# Altium PCB PCB_Air Data Controller_2021-07-25.pcbdoc
Units mil, origin at the board's own origin, x right, y up, seen from the top; angles counter-clockwise.
Board outline 4950 x 4235 mil, 2 copper layers (Top Layer, Bottom Layer); 48 components, 79 nets, 283 pads, 68 vias.
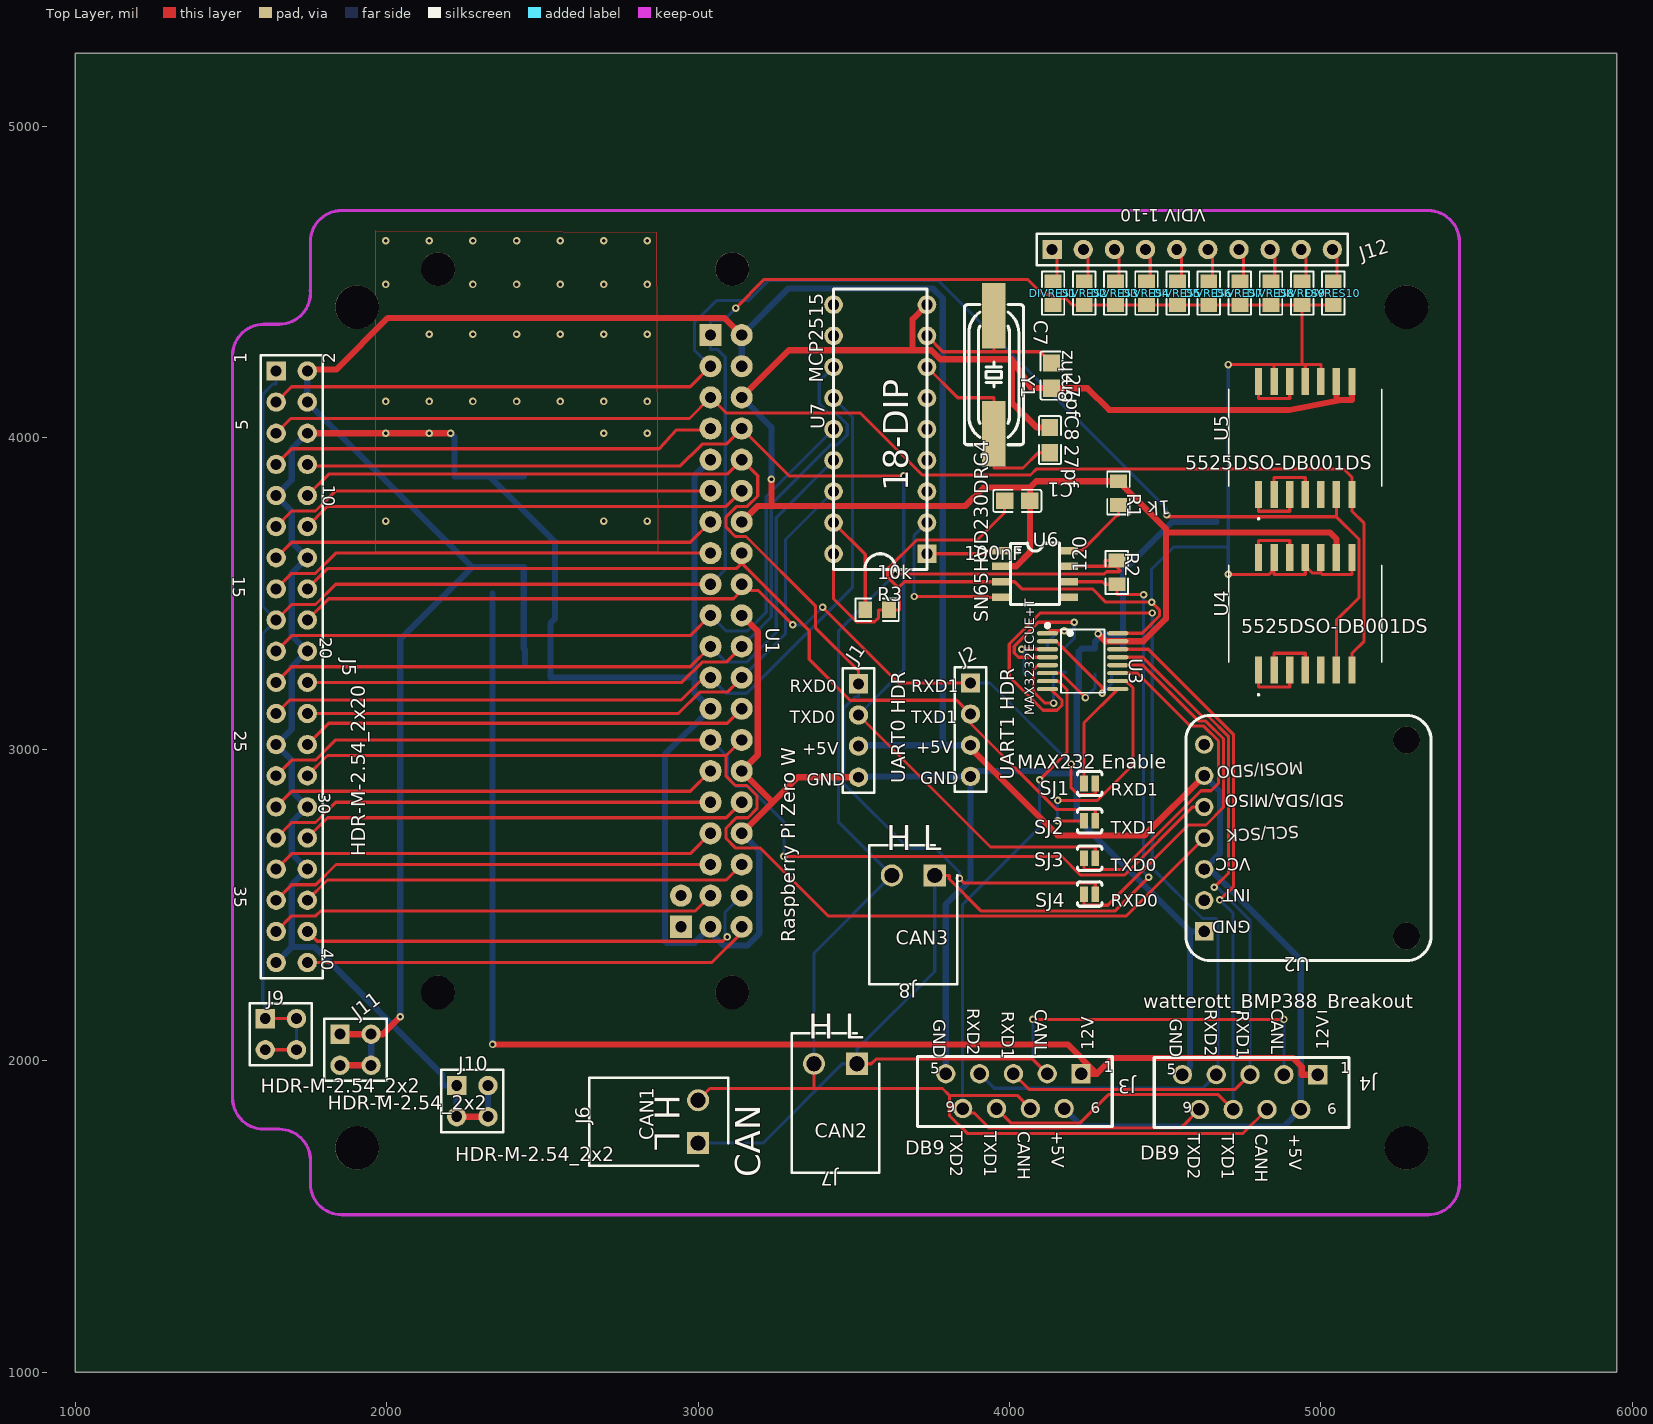
[diagram p0: Top Layer view]
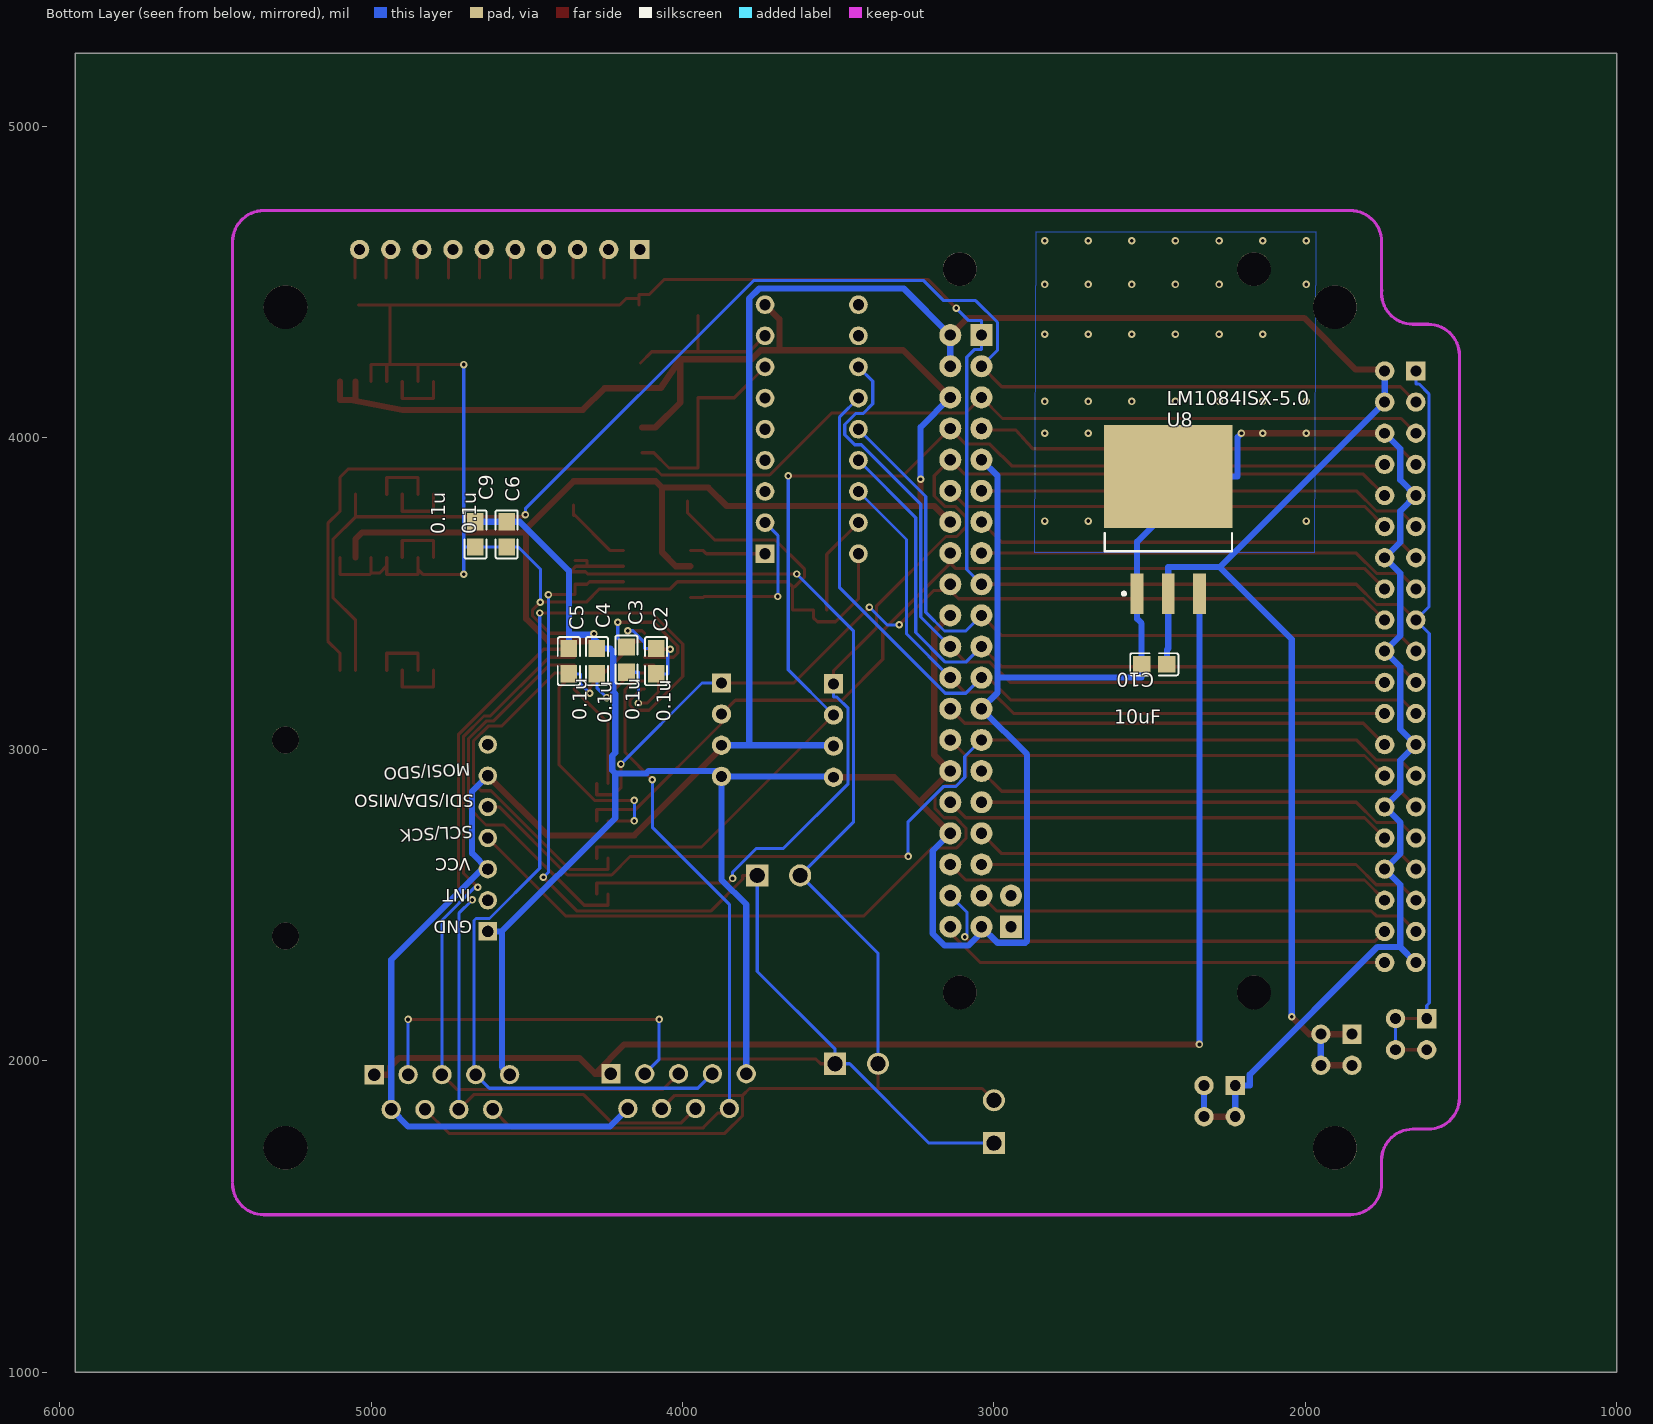
[diagram p1: Bottom Layer view, seen from below]

## Layer stack, top to bottom
Top Layer: signal copper (thickness not stored)
Dielectric: dielectric 12.6, FR-4, Dk 4.8
Bottom Layer: signal copper (thickness not stored)

## Board outline
5950,1000 1000,1000 1000,5235 5950,5235

## Components (designator, comment, footprint, x,y, rotation, side; value= is the part's Value field where it differs from the comment)
C1 "100nF" C0805#1 4025,3797.89 r180 top
C2 "0.1u" C0805#2 4085,3282.89 r270 bottom
C3 "0.1u" C0805#2 4180,3287.89 r270 bottom
C4 "0.1u" C0805#2 4275,3282.89 r90 bottom
C5 "0.1u" C0805#2 4365,3282.89 r90 bottom
C6 "0.1u" C0805#2 4565,3690 r270 bottom
C7 "27pf" C0805#1 4135,4200 r90 top
C8 "27pf" C0805#1 4130,3992.89 r270 top
C9 "0.1u" C0805#2 4665,3690 r270 bottom
C10 "10uF" C0805#2 2485,3272.89 r180 bottom
DIVRES1 "Divider Resistor" R0805 4140,4465 r90 top
DIVRES2 "Divider Resistor" R0805 4240,4465 r90 top
DIVRES3 "Divider Resistor" R0805 4340,4465 r90 top
DIVRES4 "Divider Resistor" R0805 4440,4465 r90 top
DIVRES5 "Divider Resistor" R0805 4540,4465 r90 top
DIVRES6 "Divider Resistor" R0805 4640,4465 r90 top
DIVRES7 "Divider Resistor" R0805 4740,4465 r90 top
DIVRES8 "Divider Resistor" R0805 4840,4465 r90 top
DIVRES9 "Divider Resistor" R0805 4940,4465 r90 top
DIVRES10 "Divider Resistor" R0805 5040,4465 r90 top
J1 "UART0 HDR" HDR-M-2.54_1X4 3515,3060 r270 top
J2 "UART1 HDR" HDR-M-2.54_1X4 3875,3062.89 r270 top
J3 "DB9" DB9 4230,1957.89 r180 top
J4 "DB9" DB9 4990,1955 r180 top
J5 "HDR-M-2.54_2x20" HDR-M-2.54_2X20 1695,3265 r270 top
J6 "CAN1" SHDR2W100P0X350_1X2_700X1120X1 3000,1735 r90 top
J7 "CAN2" SHDR2W100P0X350_1X2_700X1120X1 3510,1990 r180 top
J8 "CAN3" SHDR2W100P0X350_1X2_700X1120X1 3760,2595 r180 top
J9 "HDR-M-2.54_2x2" HDR-M-2.54_2X2 1660,2084.99 r0 top
J10 "HDR-M-2.54_2x2" HDR-M-2.54_2X2 2275,1869.99 r0 top
J11 "HDR-M-2.54_2x2" HDR-M-2.54_2X2 1900,2034.99 r0 top
J12 "Voltage Divider" HDR-M-2.54_1X10 4587.11,4605 r0 top
R1 "1k" R0805 4350,3822.89 r270 top
R2 "120" R0805 4345,3567.89 r90 top
R3 "10k" R0805 3575,3447.89 r0 top
SJ1 "UART1 RX jmp" SJ_2S-NO 4257.5,2890.01 r0 top
SJ2 "UART1 TX jmp" SJ_2S-NO 4257.5,2770.01 r0 top
SJ3 "UART0 TX jmp" SJ_2S-NO 4257.5,2650.01 r0 top
SJ4 "UART0 RX jmp" SJ_2S-NO 4257.5,2535.01 r0 top
U1 "Raspberry Pi Zero W" "RASPBERRY PI ZERO" 2640,3380 r270 top
U2 "watterott_BMP388_Breakout" WATTEROTT_BMP388_BREAKOUT 5275,2400 r180 top
U3 "MAX3232ECUE+T" TSSOP-16_L5.0-W4.4-P0.65-LS6.4-BL 4235,3282.89 r270 top
U4 "5525DSO-DB001DS" "TE_5525DSO-DB001DS COPY 2" 4950,3434.99 r90 top
U5 "5525DSO-DB001DS" "TE_5525DSO-DB001DS COPY 2" 4950,3999.99 r90 top
U6 "SN65HVD230DRG4" SN65HVD230DR 4085,3562.89 r0 top
U7 "MCP2515" 18-DIP 3735,3627.89 r90 top
U8 "LM1084ISX-5.0" TS3B 2440,3687.89 r0 bottom
Y1 "8mhz" HC-49U 3950,4202.89 r270 top

## Footprints (in the part's own frame and the unit in brackets; to place one, negate y for a bottom-side part, rotate by r counter-clockwise, add the part's x,y. Pads: shape width x height; smd on the part's side, far side on the other; paste and mask are expansions set on the pad)
18-DIP [mil]
  rect 60x60 hole 36: 1(0,0)
  round 60 hole 36: 2(100,0) 3(200,0) 4(300,0) 5(400,0) 6(500,0) 7(600,0) 8(700,0) 9(800,0) 10(800,300) 11(700,300) 12(600,300) 13(500,300) 14(400,300) 15(300,300) 16(200,300) 17(100,300) 18(0,300)
  silkscreen extent -50,0 850,300
C0805#1 [mm]
  rect 1.41x1.35 smd: 1(-1.03,0) 2(1.03,0)
  silkscreen extent -1.96,-0.9 1.96,0.9
C0805#2 [mm]
  rect 1.41x1.35 smd: 1(1.03,0) 2(-1.03,0)
  silkscreen extent -1.96,-0.9 1.96,0.9
DB9 [mil]
  rect 62x62 hole 40: 1(0,0)
  round 62 hole 40: 2(108.66,0) 3(217.32,0) 4(325.98,0) 5(434.64,0) 6(54.33,111.81) 7(162.99,111.81) 8(271.65,111.81) 9(380.31,111.81)
  silkscreen extent -100,-55 525,170
HC-49U [mil]
  rect 210x76 smd: 1(-190,0) 2(190,0)
  silkscreen extent -225,-95 225,95
HDR-M-2.54_1X4 [mil]
  rect 62x62 hole 35: 1(-150,0)
  round 62 hole 35: 2(-50,0) 3(50,0) 4(150,0)
  silkscreen extent -200,-50 200,50
HDR-M-2.54_1X10 [mil]
  rect 62x62 hole 35: 1(-450,0)
  round 62 hole 35: 2(-350,0) 3(-250,0) 4(-150,0) 5(-50,0) 6(50,0) 7(150,0) 8(250,0) 9(350,0) 10(450,0)
  silkscreen extent -500,-50 500,50
HDR-M-2.54_2X2 [mil]
  rect 62x62 hole 35: 1(-50,50)
  round 62 hole 35: 2(50,50) 3(-50,-50) 4(50,-50)
  silkscreen extent -100,-100 100,100
HDR-M-2.54_2X20 [mil]
  rect 62x62 hole 35: 1(-950,-50)
  round 62 hole 35: 2(-950,50) 3(-850,-50) 4(-850,50) 5(-750,-50) 6(-750,50) 7(-650,-50) 8(-650,50) 9(-550,-50) 10(-550,50) 11(-450,-50) 12(-450,50) 13(-350,-50) 14(-350,50) 15(-250,-50) 16(-250,50) 17(-150,-50) 18(-150,50) 19(-50,-50) 20(-50,50) 21(50,-50) 22(50,50) 23(150,-50) 24(150,50) 25(250,-50) 26(250,50) 27(350,-50) 28(350,50) 29(450,-50) 30(450,50) 31(550,-50) 32(550,50) 33(650,-50) 34(650,50) 35(750,-50) 36(750,50) 37(850,-50) 38(850,50) 39(950,-50) 40(950,50)
  silkscreen extent -1000,-100 1000,100
R0805 [mil]
  rect 44.59x54.21 smd: 1(-38.04,0) 2(38.04,0)
  silkscreen extent -69,-36 69,36
"RASPBERRY PI ZERO" [mm]
  rect 1.8x1.8 hole 0.914: 1(-24.13,10.16) 42(24.13,7.747)
  round 1.8 hole 0.914: 2(-24.131,12.7) 3(-21.591,10.16) 4(-21.591,12.7) 5(-19.051,10.16) 6(-19.051,12.7) 7(-16.511,10.16) 8(-16.511,12.7) 9(-13.971,10.16) 10(-13.971,12.7) 11(-11.431,10.16) 12(-11.431,12.7) 13(-8.891,10.16) 14(-8.891,12.7) 15(-6.351,10.16) 16(-6.351,12.7) 17(-3.811,10.16) 18(-3.811,12.7) 19(-1.271,10.16) 20(-1.271,12.7) 21(1.269,10.16) 22(1.269,12.7) 23(3.809,10.16) 24(3.809,12.7) 25(6.349,10.16) 26(6.349,12.7) 27(8.889,10.16) 28(8.889,12.7) 29(11.429,10.16) 30(11.429,12.7) 31(13.969,10.16) 32(13.969,12.7) 33(16.509,10.16) 34(16.509,12.7) 35(19.049,10.16) 36(19.049,12.7) 37(21.589,10.16) 38(21.589,12.7) 39(24.13,10.16) 40(24.13,12.7) 41(21.59,7.747)
  round 2.748 hole 2.748 unplated: ""(-29.513,-12.07) ""(-29.513,11.931) ""(29.486,-12.07) ""(29.486,11.931)
SHDR2W100P0X350_1X2_700X1120X1 [mil]
  rect 70.87x70.87 hole 47.24 slot 47.44 at 0 deg: 1(0,0)
  round 70.87 hole 47.24 slot 47.44 at 0 deg: 2(137.79,0)
  silkscreen extent -72,-97 210,349
SJ_2S-NO [mil]
  rect 25x50 smd: 1(-18,0) 2(18,0)
  silkscreen extent -40,-39 40,39
SN65HVD230DR [mm]
  rect 1.55x0.6 smd: 1(-2.794,1.905) 2(-2.794,0.635) 3(-2.794,-0.635) 4(-2.794,-1.905) 5(2.667,-1.905) 6(2.667,-0.635) 7(2.667,0.635) 8(2.667,1.905)
  silkscreen extent -2.07,-2.5 1.93,2.5
"TE_5525DSO-DB001DS COPY 2" [mil]
  rect 86.61x23.62 smd: 1(-181.1,150) 2(-181.1,100) 3(-181.1,50) 4(-181.1,0) 5(-181.1,-50) 6(-181.1,-100) 7(-181.1,-150) 8(181.1,-150) 9(181.1,-100) 10(181.1,-50) 11(181.1,0) 12(181.1,50) 13(181.1,100) 14(181.1,150)
  silkscreen extent -263,-246 156,246
TS3B [mil]
  rect 41.5x130.5 smd: 1(100,188) 2(0,188) 3(-100,188)
  rect 413.5x331.5 smd: 4(0,-188)
  silkscreen extent -205,-7 205,193
TSSOP-16_L5.0-W4.4-P0.65-LS6.4-BL [mm]
  oval 0.343x1.731 smd: 1(-2.275,-2.866) 2(-1.625,-2.866) 3(-0.975,-2.866) 4(-0.325,-2.866) 5(0.325,-2.866) 6(0.975,-2.866) 7(1.625,-2.866) 8(2.275,-2.866) 9(2.275,2.866) 10(1.625,2.866) 11(0.975,2.866) 12(0.325,2.866) 13(-0.325,2.866) 14(-0.975,2.866) 15(-1.625,2.866) 16(-2.275,2.866)
  silkscreen extent -3.05,-3.02 2.58,1.77
WATTEROTT_BMP388_BREAKOUT [mm]
  round 1.5 hole 0.9 slot 0.9 at 0 deg: CS(16.5,-15.62) INT(16.5,-2.92) MOSI/SDO(16.5,-13.08) SCL/SCK(16.5,-8) SDA/MISO(16.5,-10.54) VCC(16.5,-5.46)
  rect 1.5x1.5 hole 0.9 slot 0.9 at 0 deg: GND(16.5,-0.38)
  round 2.2 hole 2.2 unplated: ""(0,0) ""(0,-16)
  silkscreen extent -2,-18 18,2

## Free pads (board coordinates)
  round 140 hole 140 unplated: ""(1905,1720) ""(1905,4420) ""(5275,1720) ""(5275,4420)

## Via types
v1: diameter 24, hole 12, Top Layer to Bottom Layer, 64 vias
v2: diameter 24.02, hole 12.01, Top Layer to Bottom Layer, 4 vias

## Nets (pads, with @x,y where several pads share a name; then routed paths per layer and width w, separated by ;. In a path a pad name is that pad's centre, name@x,y a point inside that pad or via, vN(x,y) a via of type N, cw(c..) or ccw(c..) an arc to the next point about the centre after c; other vN are vias at no path point)
3V3: C1.2 C6.1 C9.1 DIVRES1.1 DIVRES2.1 DIVRES3.1 DIVRES4.1 DIVRES5.1 DIVRES6.1 DIVRES7.1 DIVRES8.1 DIVRES9.1 DIVRES10.1 J5.1 J5.17 J9.1 J9.2 J9.3 J9.4 R3.2 U1.1 U1.17 U3.16 U4.8 U4.10 U4.11 U4.13 U5.10 U5.11 U5.13 U6.3 U7.18 | length 11348.1
  Top Layer w10: J9.3 J9.4 ; J9.1 J9.2 ; J5.17 1695,3465 1771.45,3465 1836.48,3530.03 U1.17 ; v2(3120.84,4416.86) 3212.95,4508.97 4057.99,4508.97 4106.64,4460.32 4140,4460.32 DIVRES1.1@4140,4447.6 ; U7.18 3435,3483.23 3508.53,3409.7 3566.51,3409.7 3579.68,3422.87 3579.68,3447.89 R3.2 3646.41,3447.89 3646.41,3521.6 ; C1.2 3984.45,3760.25 3896.39,3672.19 3701.71,3672.19 3608.85,3579.33 3608.85,3552.72 3639.97,3521.6 3646.41,3521.6 ; DIVRES1.1 DIVRES1.1@4140,4447.6 ; U3.16 4425.91,3372.46 4481.51,3428.06 4481.51,3447.75 v2(4456.74,3472.52) 4308.97,3472.52 4266.48,3515.01 4039.46,3515.01 4016.58,3537.89 U6.3 3662.7,3537.89 3646.41,3521.6 ; v2(4702.65,3561.72) 4833.93,3561.72 U4.13@4850,3577.79 ; v2(4702.65,4235.47) 4850,4235.47 ; U4.13 4850,3588.91 U4.13@4850,3577.79 ; U5.13 4850,4235.47 ; U4.11 U4.11@4950,3588.91 ; U5.11 4950,4235.47 4940,4235.47 ; 4950,4235.49 5000,4234.99 U5.10 ; U4.10 5000,3565.75 ; DIVRES10.1 DIVRES9.1 ; U4.8 5100,3561.72 5004.03,3561.72 5000,3565.75 ; DIVRES1.1@4140,4447.6 4181.18,4447.6 4201.82,4426.96 DIVRES2.1 DIVRES3.1 DIVRES4.1 DIVRES5.1 DIVRES6.1 DIVRES7.1 DIVRES8.1 DIVRES9.1 ; U4.13@4850,3577.79 4850,3561.72 4950,3561.72 U4.11@4950,3588.91 ; 4850,4235.47 4940,4235.47 ; 4940,4235.47 4940,4393.59 DIVRES9.1 ; U4.11@4950,3588.91 4973.16,3565.75 5000,3565.75
  Bottom Layer w10: J9.1 1610,2177.06 1601.82,2185.24 1601.82,3371.82 J5.17 1602.93,3457.07 1602.93,4141.39 1634.47,4172.93 1645,4172.93 J5.1 ; J9.4 J9.2 ; U1.17 3087.22,3577.24 3087.22,4259.53 3063.25,4283.5 3040,4283.5 3040,4306.75 U1.1 3040,4376.5 3080.48,4376.5 v2(3120.84,4416.86) ; v2(4456.74,3472.52) 4456.74,3578.83 4527.36,3649.45 C6.1 C9.1 4683.83,3649.45 4702.65,3649.45 ; v2(4702.65,3561.72) 4702.65,3649.45 ; v2(4702.65,4235.47) 4702.65,3649.45
+5V: C10.1 J1.3 J2.3 J3.6 J4.6 J5.2 J5.4 J11.1 J11.2 J11.3 J11.4 U1.2 U1.4 U2.MOSI/SDO U2.VCC U8.2 | length 10406.6
  Top Layer w20: J5.2 1749.52,4219.52 1837.81,4219.52 2003.74,4385.45 3084.59,4385.45 U1.2 ; J11.3 J11.4 ; J11.1 J11.2 1987.55,2085 v1(2043.18,2140.63) ; J2.3 3875,3003.19 4154.95,2723.24 4433.68,2723.24 U2.MOSI/SDO
  Bottom Layer w20: J5.2 J5.4 2274.85,3585.15 ; J11.4 J11.2 ; v1(2043.18,2140.63) 2043.18,3353.48 2274.85,3585.15 ; C10.1 2444.45,3319.48 2440,3323.93 U8.2 2440,3542.52 2440,3585.15 2274.85,3585.15 ; U1.4 U1.2 3289.72,4479.74 3753.88,4479.74 3785.81,4447.81 3785.81,3012.89 ; J1.3 3517.89,3012.89 3785.81,3012.89 ; J2.3 3785.81,3012.89 ; J3.6 4233.54,1788.21 4880.69,1788.21 J4.6 4935.67,2324.02 4644.73,2614.96 U2.VCC 4675.85,2665.41 4675.85,2864.51 U2.MOSI/SDO
AIRCRAFT_POWER: J3.1 J4.1 U8.3 | length 4246.2
  Top Layer w20: v1(2340,2052.09) 4186.81,2052.09 4281.01,1957.89 ; J3.1 4281.01,1957.89 ; J4.1 4938.99,1955 4938.99,1980.5 4910.59,2008.9 4332.02,2008.9 4281.01,1957.89
  Bottom Layer w20: v1(2340,2052.09) U8.3
C2_1: C2.1 U3.3 | length 202.2
  Top Layer w10: v1(4039.74,3321.27) U3.3
  Bottom Layer w10: v1(4039.74,3321.27) 4047.34,3313.67 4047.34,3242.34 C2.1
C2_2: C2.2 U3.1 | length 183.9
  Top Layer w10: U3.1@4122.18,3372.45 4130.24,3380.51 v1(4175.98,3380.51)
  Bottom Layer w10: C2.2 4122.67,3323.44 4122.67,3344.16 4159.02,3380.51 v1(4175.98,3380.51)
C3_1: C3.1 U3.5 | length 338.4
  Top Layer w10: U3.5 4091.75,3270.08 4076.95,3255.28 4076.95,3184.85 4113.41,3148.39 v1(4141.58,3148.39)
  Bottom Layer w10: v1(4141.58,3148.39) 4141.58,3246.58 4142.34,3247.34 C3.1
C3_2: C3.2 U3.4 | length 449.9
  Top Layer w10: U3.4 4029.05,3295.67 4015.33,3309.39 4015.33,3331.26 4091.93,3407.86 v1(4208.04,3407.86)
  Bottom Layer w10: C3.2 4208.04,3356.48 v1(4208.04,3407.86)
C4_2: C4.2 U3.6 | length 243.3
  Top Layer w10: U3.6 4165.43,3244.49 v1(4243.83,3166.09)
  Bottom Layer w10: v1(4243.83,3166.09) 4275,3197.26 C4.2
C5_2: C5.2 U3.2 | length 367.9
  Top Layer w10: U3.2 4150.19,3346.86 4298.1,3198.95 v1(4298.1,3180.16)
  Bottom Layer w10: v1(4298.1,3180.16) 4327.34,3209.4 4327.34,3242.34 C5.2
CAN_CS: J5.24 U1.24 U7.16 | length 2162.7
  Top Layer w10: J5.24 2936.36,3115 3004.87,3183.51 3093.49,3183.51 U1.24
  Bottom Layer w10: U1.24 3280.58,3370.6 3280.58,3673.47 U7.16
CAN_INT: J5.22 U1.22 U7.12 | length 2563.8
  Top Layer w10: J5.22 2947.77,3215 3012.8,3280.03 3090.01,3280.03 U1.22
  Bottom Layer w10: U1.22 3234.86,3424.88 3234.86,3786.98 3425.77,3977.89 3447,3977.89 3479.17,4010.06 3479.17,4043.16 3444.44,4077.89 3420.61,4077.89 3388.97,4109.53 3388.97,4181.86 U7.12
CAN_MISO: J5.21 U1.21 U7.15 | length 2342.7
  Top Layer w10: J5.21 1695,3265 2974.98,3265 U1.21
  Bottom Layer w10: U1.21 3090.01,3280.03 3155.83,3280.03 3250.97,3375.17 3250.97,3743.86 U7.15
CAN_MOSI: J5.19 U1.19 U7.14 | length 2344.3
  Top Layer w10: J5.19 1695,3365 2974.98,3365 U1.19
  Bottom Layer w10: U1.19 3090.01,3380.03 3158.62,3380.03 3218.74,3440.15 3218.74,3811.63 U7.14
CAN_RXD: U6.4 U7.2 | length 536.5
  Top Layer w10: v1(3693.91,3490.64) 3930.65,3490.64 3933.4,3487.89 U6.4
  Bottom Layer w10: v1(3693.91,3490.64) 3693.91,3686.8 U7.2
CAN_SCK: J5.23 U1.23 U7.13 | length 2693
  Top Layer w10: J5.23 1687.87,3157.87 2945.08,3157.87 3017.24,3230.03 U1.23
  Bottom Layer w10: U1.23 3090.01,3180.03 3156.44,3180.03 3495.28,3518.87 3495.28,4067.61 U7.13
CAN_TXD: U6.1 U7.1 | length 244.1
  Top Layer w10: U7.1 3923.4,3627.89 3933.4,3637.89 U6.1
CANH: J3.7 J4.7 J6.2 J7.2 J8.2 R2.2 U6.7 | length 5107.8
  Top Layer w10: J6.2 3037.85,1910.64 3372.21,1910.64 ; J7.2 3372.21,1910.64 ; v1(3633.28,3562.89) 4304.7,3562.89 4312,3570.19 4353.14,3570.19 4356.07,3573.12 4356.07,3574.33 4342.51,3587.89 4306.8,3587.89 ; J3.7 4024.64,1888.45 3807.01,1888.45 ; U6.7 4306.8,3587.89 ; R2.2 4306.8,3605.93 4306.8,3587.89 ; J4.7 4750.09,1766.27 3864.45,1766.27 3807.01,1823.71 3807.01,1888.45 ; 3372.21,1910.64 3784.82,1910.64 3807.01,1888.45
  Bottom Layer w10: J7.2 3372.21,2345 J8.2 3451.52,2765.69 3451.52,3381.13 v1(3633.28,3562.89)
CANL: J3.2 J4.2 J6.1 J7.1 J8.1 R2.1 U6.6 | length 5116.6
  Top Layer w10: J7.1 3556.53,1990 3571.33,2004.8 4074.43,2004.8 J3.2 ; J8.1 3806.53,2595 3806.53,2583.36 3909.83,2480.06 4338.04,2480.06 v1(4446.87,2588.89) ; v1@4075,2132.45 v1@4881.34,2132.45 ; U6.6 4298.76,3537.89 4306.8,3529.85 4325.9,3529.85 R2.1 4345,3496.46 v1(4430.55,3496.46)
  Bottom Layer w10: J6.1 3208.48,1735 3463.48,1990 J7.1 3510,2036.53 3760,2286.53 J8.1 ; v1@4075,2132.45 4075,2004.23 J3.2 ; v1(4430.55,3496.46) 4430.55,2605.21 v1(4446.87,2588.89) ; J4.2 v1@4881.34,2132.45
  other v1: 4075,2132.45 4881.34,2132.45
GND: C1.1 C4.1 C5.1 C6.2 C7.1 C8.1 C9.2 C10.2 J1.4 J2.4 J3.5 J4.5 J5.6 J5.9 J5.14 J5.20 J5.25 J5.30 J5.34 J5.39 J10.1 J10.2 J10.3 J10.4 R1.1 U1.6 U1.9 U1.14 U1.20 U1.25 U1.30 U1.34 U1.39 U2.GND U3.15 U4.9 U5.8 U5.9 U6.2 U7.9 U8.1 U8.4 | length 18697.1
  Top Layer w20: J5.6 v1(2204.97,4015) ; J10.3 J10.4 ; U1.34 3240.01,2830.03 ; U1.20 3191.52,3378.52 3191.52,2981.54 U1.30 3240.01,2830.03 ; U1.14 3191.26,3781.28 3235.47,3781.28 ; U1.6 3291.79,4281.81 3688.82,4281.81 ; v1(3235.47,3867.59) 3235.47,3781.28 ; J1.4 3319.98,2910 3240.01,2830.03 ; U7.9 3688.82,4381.71 3688.82,4281.81 ; U6.2 4021.52,3587.89 4065.55,3631.92 C1.1 4065.55,3840.48 ; C8.1 4087.42,4033.44 4007.3,4113.56 4007.3,4252.22 ; v1(4284.38,3370.88) 4308.4,3346.86 U3.15 4430.12,3346.86 4502.6,3419.34 4502.6,3696.46 ; U4.9 5050,3675.41 5028.95,3696.46 4502.6,3696.46 ; U5.9 5050,4169.13 5050,4121.78 5100,4121.78 U5.8 ; 5064.7,4121.79 4899.6,4089.99 4320,4089.99 4250.5,4159.49 4135,4159.49 4070,4160 4007.3,4252.19 ; 3235.47,3781.28 3857.62,3781.28 3916.89,3840.55 4065.48,3840.55 4065.55,3840.48 ; 3688.82,4281.81 3748.74,4281.81 3778.33,4252.22 4007.3,4252.22 ; 4065.55,3840.48 4086,3860.93 R1.1 4502.6,3708.33 4502.6,3696.46
  Bottom Layer w20: J5.39 1695,2365 ; J5.6 1695,3965 1695,3865 J5.9 1695,3765 1695,3665 J5.14 1695,3565 1695,3365 J5.20 1695,3265 1695,3065 J5.25 1695,2965 1695,2865 J5.30 1695,2765 1695,2665 J5.34 1695,2565 1695,2365 ; v1(2204.97,4015) 2217.24,4002.73 2217.24,3875.89 U8.4@2330.99,3875.89 ; J10.3 J10.1 2177.99,1920 2177.99,1955.26 1768.25,2365 1695,2365 ; J10.4 J10.2 ; U8.4 U8.4@2330.99,3875.89 ; U1.9 2988.5,3878.52 2988.5,3230.31 ; U1.34 3196.41,2673.63 3196.41,2408.1 3157.7,2369.39 3081.9,2369.39 3040,2411.29 U1.39 2988.49,2378.49 2899.33,2378.49 2893.49,2384.33 2893.49,2983.51 U1.25 2988.5,3181.54 2988.5,3230.31 ; U1.6 3235.47,4034.57 v1(3235.47,3867.59) ; J1.4 3517.89,2912.89 J2.4 ; J3.5 3795.36,2501.58 3875,2581.22 J2.4 ; v1(4284.38,3370.88) v1@4284.38,3367.67 ; C5.1 4365,3367.67 ; J4.5 4579.87,1979.51 4579.87,2414.96 ; U2.GND 4579.87,2414.96 ; C9.2@4665,3730.55 4565,3730.55 4522.42,3730.55 4365,3573.13 4365,3367.67 ; U8.4@2330.99,3875.89 2540,3666.88 U8.1 2540,3418.63 2525.55,3404.18 C10.2 2525.55,3230.31 2988.5,3230.31 ; J2.4 3892.62,2930.51 4108.66,2930.51 4116.75,2922.42 4215.76,2922.42 ; 4215.76,2922.42 4215.76,2779.07 4579.87,2414.96 ; 4215.76,2922.42 4225.95,2932.61 4225.95,2978.69 4215.76,2988.88 4215.76,3177.71 4222.66,3184.61 4222.66,3313.68 4232.42,3323.44 C4.1 4275,3345.33 4284.38,3354.71 v1@4284.38,3367.67 ; v1@4284.38,3367.67 4365,3367.67
  other v1: 1997,3732.83 2697,3732.83 2837,3732.83 1997,4015.02 2137,4015.02 2697,4015.02 2837,4015.02 1997,4117.22 2137,4117.22 2277,4117.22 2417,4117.22 2557,4117.22 2697,4117.22 2837,4117.22 2137,4333.25 2277,4333.25 2417,4333.25 2557,4333.25 2697,4333.25 2837,4333.25 1997,4492.87 2277,4492.87 2417,4492.87 2557,4492.87 2697,4492.87 2837,4492.87 1997,4632.87 2137,4632.87 2277,4632.87 2417,4632.87 2557,4632.87 2697,4632.87 2837,4632.87
I2C0_SCL: J5.28 U1.28 U2.SCL/SCK | length 3577.3
  Top Layer w10: J5.28 1810.03,2980.03 3090.01,2980.03 ; U1.28 3090.01,2980.03 ; U2.SCL/SCK 4374.39,2463.95 3418.56,2463.95 3199.01,2683.5 3119.79,2683.5 3090.01,2713.28 3090.01,2747.17 3122.87,2780.03 3160.17,2780.03 3188.77,2808.63 3188.77,2851.43 3156.7,2883.5 3119.79,2883.5 3090.01,2913.28 3090.01,2980.03
I2C0_SDA: J5.27 U1.27 U2.SDA/MISO | length 3402.7
  Top Layer w10: J5.27 1695,2965 1771.45,2965 1836.48,3030.03 U1.27 ; v1(3275.32,2655.72) 4168.46,2655.72 4227.73,2596.45 4369.85,2596.45 4588.36,2814.96 U2.SDA/MISO
  Bottom Layer w10: U1.27 3093.48,2976.56 3093.48,2909.81 3123.26,2880.03 3162.81,2880.03 3275.32,2767.52 v1(3275.32,2655.72)
I2C1_SCL: J5.5 U1.5 U4.7 U5.7 | length 4277.1
  Top Layer w10: J5.5 1692.22,4062.22 2972.2,4062.22 U1.5 3090.01,4080.03 3520.93,4080.03 3720.27,3880.69 4067.77,3880.69 4087.54,3900.46 5072.83,3900.46 5100,3873.29 U5.7 5100,3791.7 5100,3764.5 5139.01,3725.49 5139.01,3347.3 5100,3308.29 U4.7
I2C1_SDA: J5.3 U1.3 U4.6 U5.6 | length 4673.4
  Top Layer w10: J5.3 1694.42,4164.42 2974.4,4164.42 U1.3 ; v1@4504.6,3752.95 4510.82,3746.73 5050,3746.73 ; U4.6 5050,3414.47 5122.9,3487.37 5122.9,3673.83 5050,3746.73 ; U5.6 5050,3746.73
  Bottom Layer w10: U1.3 2988.44,4281.6 2988.44,4370.86 3058.54,4440.96 3160.95,4440.96 3225.23,4505.24 3772.3,4505.24 4504.6,3772.94 v1@4504.6,3752.95
  other v1: 4504.6,3752.95
J12_1: DIVRES1.2 J12.1 | length 107
  Top Layer w10: DIVRES1.2@4152.11,4513.04 J12.1@4152.11,4620
J12_2: DIVRES2.2 J12.2 | length 107
  Top Layer w10: DIVRES2.2@4252.11,4513.04 J12.2@4252.11,4620
J12_3: DIVRES3.2 J12.3 | length 107
  Top Layer w10: DIVRES3.2@4352.11,4513.04 J12.3@4352.11,4620
J12_4: DIVRES4.2 J12.4 | length 107
  Top Layer w10: DIVRES4.2@4452.11,4513.04 J12.4@4452.11,4620
J12_5: DIVRES5.2 J12.5 | length 107
  Top Layer w10: DIVRES5.2@4552.11,4513.04 J12.5@4552.11,4620
J12_6: DIVRES6.2 J12.6 | length 107
  Top Layer w10: DIVRES6.2@4652.11,4513.04 J12.6@4652.11,4620
J12_7: DIVRES7.2 J12.7 | length 107
  Top Layer w10: DIVRES7.2@4752.11,4513.04 J12.7@4752.11,4620
J12_8: DIVRES8.2 J12.8 | length 107
  Top Layer w10: DIVRES8.2@4852.11,4513.04 J12.8@4852.11,4620
J12_9: DIVRES9.2 J12.9 | length 107
  Top Layer w10: DIVRES9.2@4952.11,4513.04 J12.9@4952.11,4620
J12_10: DIVRES10.2 J12.10 | length 107
  Top Layer w10: DIVRES10.2@5052.11,4513.04 J12.10@5052.11,4620
NETPORT7: J5.7 U1.7 | length 1444.2
  Top Layer w10: J5.7 1695,3964.99 2875,3965 2930,4025 3034.98,4025 U1.7
NETPORT11: J5.11 U1.11 | length 1442.7
  Top Layer w10: J5.11 1695,3765 1771.45,3765 1836.48,3830.03 U1.11
NETPORT12: J5.12 U1.12 | length 1442.7
  Top Layer w10: J5.12 1810.03,3780.03 3090.01,3780.03 U1.12
NETPORT13: J5.13 U1.13 | length 1442.7
  Top Layer w10: J5.13 1695,3665 2974.98,3665 U1.13
NETPORT15: J5.15 U1.15 | length 1442.7
  Top Layer w10: J5.15 1695,3565 1771.45,3565 1836.48,3630.03 U1.15
NETPORT26: J5.26 U1.26 | length 1442.7
  Top Layer w10: J5.26 1813.5,3083.5 3093.48,3083.5 U1.26
NETPORT29: J5.29 U1.29 | length 1442.7
  Top Layer w10: J5.29 1695,2865 2974.98,2865 U1.29
NETPORT31: J5.31 U1.31 | length 1442.7
  Top Layer w10: J5.31 1695,2765 1771.45,2765 1836.48,2830.03 U1.31
NETPORT32: J5.32 U1.32 | length 1442.7
  Top Layer w10: J5.32 1810.03,2780.03 3090.01,2780.03 U1.32
NETPORT33: J5.33 U1.33 | length 1442.7
  Top Layer w10: J5.33 1695,2665 2974.98,2665 U1.33
NETPORT35: J5.35 U1.35 | length 1442.7
  Top Layer w10: J5.35 1695,2565 1772.21,2565 1837.24,2630.03 U1.35
NETPORT36: J5.36 U1.36 | length 1442.7
  Top Layer w10: J5.36 1810.03,2580.03 3090.01,2580.03 U1.36
NETPORT37: J5.37 U1.37 | length 1442.7
  Top Layer w10: J5.37 1695,2465 1772.21,2465 1787.63,2480.42 2990.4,2480.42 U1.37
NETPORT38: J5.38 U1.38 | length 1525
  Top Layer w10: J5.38 1776.53,2383.47 3079.53,2383.47 v1(3093.52,2397.46)
  Bottom Layer w10: v1(3093.52,2397.46) 3086.53,2404.45 3086.53,2476.55 U1.38
NETPORT40: J5.40 U1.40 | length 1453.6
  Top Layer w10: J5.40 3043.72,2315 3140,2411.28 U1.40
RS232_1_RX: J3.3 J4.3 U3.13 | length 2419.5
  Top Layer w10: J3.3 4062.68,1907.89 4725.57,1907.89 J4.3 ; U3.13 4428.1,3295.67 4617.11,3106.66 4637.44,3106.66 4703.69,3040.41 4703.69,2602.58 v1@4657.76,2556.65
  Bottom Layer w10: v1@4657.76,2556.65 4667.34,2556.65 4772.68,2451.31 J4.3
  other v1: 4657.76,2556.65
RS232_1_TX: J3.8 J4.8 U3.14 | length 2562.6
  Top Layer w10: J3.8 4005.18,1799.25 4226.2,1799.25 4317.61,1890.66 4670.88,1890.66 J4.8 ; U3.14 4445.61,3321.27 4719.8,3047.08 4719.8,2560.45 v1(4675.34,2515.99)
  Bottom Layer w10: v1(4675.34,2515.99) 4718.35,2472.98 J4.8
RS232_2_RX: J3.4 J4.4 U3.8 | length 3298.7
  Top Layer w10: U3.8 4132.96,3193.31 4168.86,3157.41 4168.86,3141.41 4152.74,3125.29 4107.61,3125.29 3999.22,3233.68 3999.22,3337.93 4098.93,3437.64 v1(4458.42,3437.64)
  Bottom Layer w10: J3.4 3950.74,1911.17 4620.19,1911.17 J4.4 4669.49,1960.47 4669.49,2449.98 4663.1,2456.37 4619.86,2456.37 4458.42,2617.81 v1(4458.42,3437.64)
RS232_2_TX: J3.9 J4.9 U3.7 | length 2374.3
  Top Layer w10: J3.9 3868.08,1827.69 3872.8,1832.41 3886.14,1832.41 3933.48,1785.07 3933.48,1783.14 4549.64,1783.14 J4.9 ; v1(4097.03,2902.44) 4184.97,2990.38 4184.97,3191.25 4157.32,3218.9 U3.7
  Bottom Layer w10: J3.9 3849.69,2501.88 4097.03,2749.22 v1(4097.03,2902.44)
S$26770: 
S$26796: 
S$26798: 
S$26810: 
S$26812: 
U2_CS: U2.CS
U2_INT: U2.INT
U3_9: SJ1.1 U3.9 | length 348.2
  Top Layer w10: SJ1.1 4239.5,3084.98 U3.9
U3_10: SJ2.1 U3.10 | length 744.7
  Top Layer w10: v1(4154.68,2770) SJ2.1 ; v1(4154.68,2835.7) 4282.05,2835.7 4396.53,2950.18 4396.53,3197.51 4375.14,3218.9 U3.10
  Bottom Layer w10: v1(4154.68,2770) v1(4154.68,2835.7)
U3_11: SJ3.1 U3.11 | length 1132.6
  Top Layer w10: SJ3.1 4239.5,2613.92 4362.14,2613.92 4614.87,2866.65 4647.19,2866.65 4671.47,2890.93 4671.47,3027.07 4624.1,3074.44 4581.16,3074.44 4411.11,3244.49 U3.11
U3_12: SJ4.1 U3.12 | length 1272.4
  Top Layer w10: SJ4.1 4239.5,2498.92 4315.77,2498.92 4573.76,2756.91 4631.13,2756.91 4687.58,2813.36 4687.58,3033.74 4630.77,3090.55 4607.99,3090.55 4428.46,3270.08 U3.12
U4_1: U4.1 U4.3 | length 208.8
  Top Layer w10: U4.1 4800,3199.5 4900,3199.5 U4.3
U4_2: U4.2 U4.4 | length 208.8
  Top Layer w10: U4.2 4850,3308.29 4950,3308.29 U4.4
U4_5: U4.5
U4_12: U4.12 U4.14 | length 208.8
  Top Layer w10: U4.14 4800,3670.49 4900,3670.49 U4.12
U5_1: U5.1 U5.3 | length 208.8
  Top Layer w10: U5.1 4800,3764.5 4900,3764.5 U5.3
U5_2: U5.2 U5.4 | length 208.8
  Top Layer w10: U5.2 4850,3873.29 4950,3873.29 U5.4
U5_5: U5.5
U5_12: U5.12 U5.14 | length 208.8
  Top Layer w10: U5.14 4800,4126.7 4900,4126.7 U5.12
U6_8: R1.2 U6.8 | length 240.4
  Top Layer w10: U6.8 4231.6,3637.89 4345.17,3751.46 4350,3751.46 R1.2
U7_7: C8.2 U7.7 Y1.2 | length 681.7
  Top Layer w10: U7.7 3833.91,4128.98 3950,4128.98 Y1.2 3950,3903.47 4043.47,3903.47 4092.34,3952.34 C8.2
U7_8: C7.2 U7.8 Y1.1 | length 552.3
  Top Layer w10: U7.8 3786.09,4276.8 3950,4276.8 ; Y1.1 3950,4276.8 ; C7.2 4098.75,4276.8 3950,4276.8
U7_17: R3.1 U7.17 | length 322.2
  Top Layer w10: U7.17 3536.96,3625.93 R3.1
UART0RX: J1.1 J5.10 SJ4.2 U1.10 | length 3775.2
  Top Layer w10: J5.10 1813.5,3883.5 3093.48,3883.5 U1.10 3191.41,3878.63 3191.41,3813.44 3158.02,3780.05 3123.81,3780.05 3090.01,3746.25 3090.01,3713.28 3119.79,3683.5 3154,3683.5 3376.51,3460.99 3376.51,3390.58 3515,3252.09 J1.1 ; v1(3839.29,2585.33) 3853.52,2571.1 4275.5,2571.1 SJ4.2
  Bottom Layer w10: J1.1 3515,3167.91 3504.48,3167.91 3468.25,3131.68 3468.25,2889.41 3676.58,2681.08 3763.74,2681.08 3839.29,2605.53 v1(3839.29,2585.33)
UART0TX: J1.2 J5.8 SJ3.2 U1.8 | length 3830.6
  Top Layer w10: J5.8 1750,3910 2920,3910 2942.77,3910 3006.41,3973.64 3012.8,3980.03 3090.01,3980.03 U1.8 3292.15,3877.89 v1(3660.45,3877.89) ; J1.2 3938.9,2686.1 4275.5,2686.1 SJ3.2
  Bottom Layer w10: J1.2 3660.45,3255.45 v1(3660.45,3877.89)
UART1RX: J2.1 J5.18 SJ1.2 U1.18 | length 2989.2
  Top Layer w10: J5.18 1813.51,3483.51 3113.87,3483.51 U1.18@3140.01,3509.65 ; U1.18 U1.18@3140.01,3509.65 ; v1@3304.1,3399.55 3194,3509.65 U1.18@3140.01,3509.65 ; v1(3399.6,3455.93) 3642.64,3212.89 J2.1 ; v1(4197.88,2952.34) 4197.88,2876.05 4220.01,2853.92 4275.5,2853.92 SJ1.2
  Bottom Layer w10: v1@3304.1,3399.55 3343.22,3399.55 v1(3399.6,3455.93) ; J2.1 3937.33,3212.89 v1(4197.88,2952.34)
  other v1: 3304.1,3399.55
UART1TX: J2.2 J5.16 SJ2.2 U1.16 | length 3032.4
  Top Layer w10: J5.16 1810.97,3580.97 3124.02,3580.97 U1.16@3140.01,3596.96 ; U1.16 U1.16@3140.01,3596.96 ; SJ2.2 4275.5,2806.1 4151.63,2806.1 3875,3082.73 J2.2 3830.41,3157.48 3488.03,3157.48 3356.87,3288.64 3356.87,3380.1 U1.16@3140.01,3596.96
pads on no net: U1. U1.41 U1.42 U2. U6.5 U7.3 U7.4 U7.5 U7.6 U7.10 U7.11

## Polygon pours and split planes (outlines as drawn)
GND on Bottom Layer (solid): 1970,3632.89 1965,4660 2865,4660 2870,3632.89
GND on Top Layer (solid): 1965,3632.89 1965,4665 2865,4660 2870,3632.89

## Keep-outs
Keep-Out Layer:
  lines w10: 1505,1880 ccw(c1605,1880) 1605,1780 ; 1505,4265 cw(c1605,4265) 1605,4365 ; 1655,1780 cw(c1655,1680) 1755,1680 ; 1655,4365 ccw(c1655,4465) 1754.5,4474.95 ; 1755,1605 ccw(c1855,1605) 1855,1505 ; 1755,4630 cw(c1855,4630) 1855,4730 ; 5345,1505 ccw(c5345,1605) 5445,1605 ; 5345,4730 cw(c5345,4630) 5445,4630

## Silkscreen, mask and mechanical layers (free items; w line width, h text height)
Top Overlay:
  text "VDIV 1-10" at 4630,4735 h40 r180
  text "1" at 1550,4240 h40 r90
  text "2" at 1835,4240 h40 r90
  text "5" at 1555,4025 h40 r90
  text "10" at 1795,3850 h40 r270
  text "15" at 1505,3555 h40 r270
  text "20" at 1785,3360 h40 r270
  text "RXD0" at 3295,3182.89 h40
  text "RXD1" at 3685,3182.89 h40
  text "TXD0" at 3295,3082.89 h40
  text "TXD1" at 3685,3082.89 h40
  text "25" at 1510,3060 h40 r270
  text "+5V" at 3700.3,2987.89 h40
  text "+5V" at 3334.8,2982.89 h40
  text "MAX232 Enable" at 4025,2937.5 h45
  text "GND" at 3713.9,2887.89 h40
  text "GND" at 3348.4,2882.89 h40
  text "30" at 1780,2860 h40 r270
  text "RXD1" at 4325,2850 h40
  text "TXD1" at 4325,2728.7 h40
  text "H L" at 3605,2675 h80
  text "TXD0" at 4325,2608.7 h40
  text "35" at 1510,2560 h40 r270
  text "RXD0" at 4325,2493.7 h40
  text "40" at 1790,2360 h40 r270
  text "RXD2" at 3865,2167.89 h40 r270
  text "CANL" at 4840.55,2167.4 h40 r270
  text "RXD2" at 4626.85,2165.6 h40 r270
  text "CANL" at 4080.55,2165.29 h40 r270
  text "RXD1" at 4730,2160 h40 r270
  text "RXD1" at 3975,2157.89 h40 r270
  text "GND" at 4515,2135 h40 r270
  text "GND" at 3755,2132.89 h40 r270
  text "H L" at 3353.85,2070 h80
  text "12V" at 5025,2035 h40 r90
  text "12V" at 4270,2032.89 h40 r90
  text "H L" at 2860,1891.15 h80 r270
  text "TXD2" at 3810,1772.89 h40 r270
  text "TXD1" at 3918.34,1772.89 h40 r270
  text "CANH" at 4026.67,1772.89 h40 r270
  text "+5V" at 4135,1772.89 h40 r270
  text "TXD2" at 4573.33,1765 h40 r270
  text "TXD1" at 4681.67,1765 h40 r270
  text "CANH" at 4790,1765 h40 r270
  text "+5V" at 4898.33,1765 h40 r270
  text "CAN" at 3200,1625 h80 r90

## Text inside footprints (layer, text, board x,y; h text height)
J3: Top Overlay "5" at 3745,1958.39 h35; Top Overlay "9" at 3797.68,1833.37 h35 r5; Top Overlay "6" at 4262.25,1829.44 h35 r5; Top Overlay "1" at 4302,1962.39 h35
J4: Top Overlay "5" at 4505,1955.5 h35; Top Overlay "9" at 4557.68,1830.48 h35 r5; Top Overlay "6" at 5022.25,1826.55 h35 r5; Top Overlay "1" at 5062,1959.5 h35
U2: Bottom Overlay "VCC" at 4680,2649.69 h39.37 r180; Bottom Overlay "INT" at 4680,2549.69 h39.37 r180; Bottom Overlay "GND" at 4675,2449.69 h39.37 r180; Bottom Overlay "SCL/SCK" at 4676.03,2754.66 h39.37 r177; Bottom Overlay "SDI/SDA/MISO" at 4670,2854.69 h39.37 r180; Bottom Overlay "MOSI/SDO" at 4681.03,2954.66 h39.37 r177; Top Overlay "GND" at 4775,2449.69 h39.37 r180; Top Overlay "INT" at 4775,2549.69 h39.37 r180; Top Overlay "VCC" at 4775,2649.69 h39.37 r180; Top Overlay "SCL/SCK" at 4928.97,2754.66 h39.37 r183; Top Overlay "SDI/SDA/MISO" at 5075,2854.69 h39.37 r180; Top Overlay "MOSI/SDO" at 4943.97,2959.66 h39.37 r183
U7: Top Overlay "18-DIP" at 3675,3827.89 h80 r90